# Altium PCB power_path_control.PcbDoc
Units mm, origin at the board's own origin, x right, y up, seen from the top; angles counter-clockwise.
Board outline 14 x 19.5 mm, 2 copper layers (Top Layer, Bottom Layer), stack 1.571 mm thick; 14 components, 6 nets, 38 pads, 43 vias.
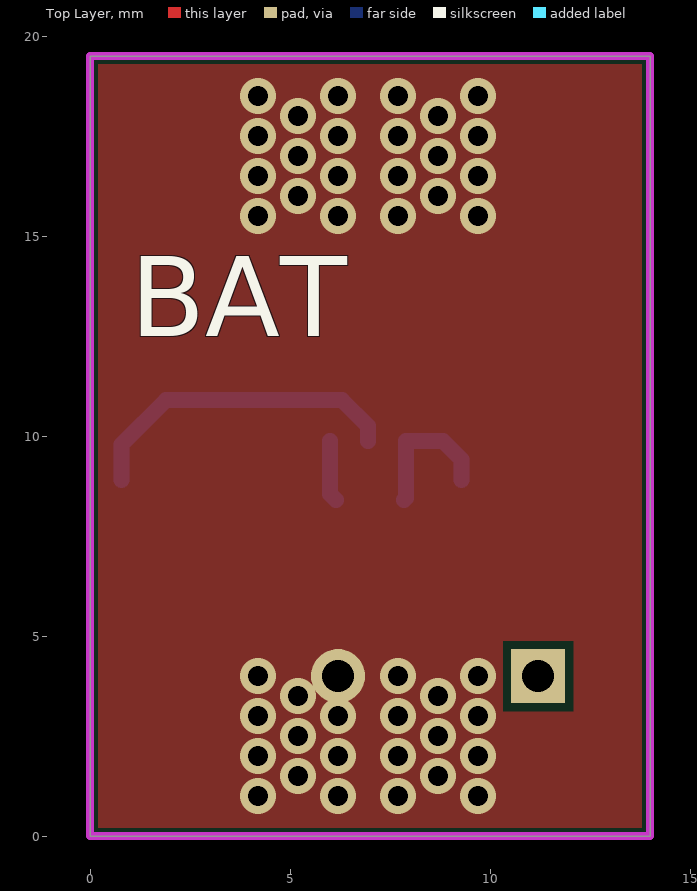
[diagram p0: Top Layer view]
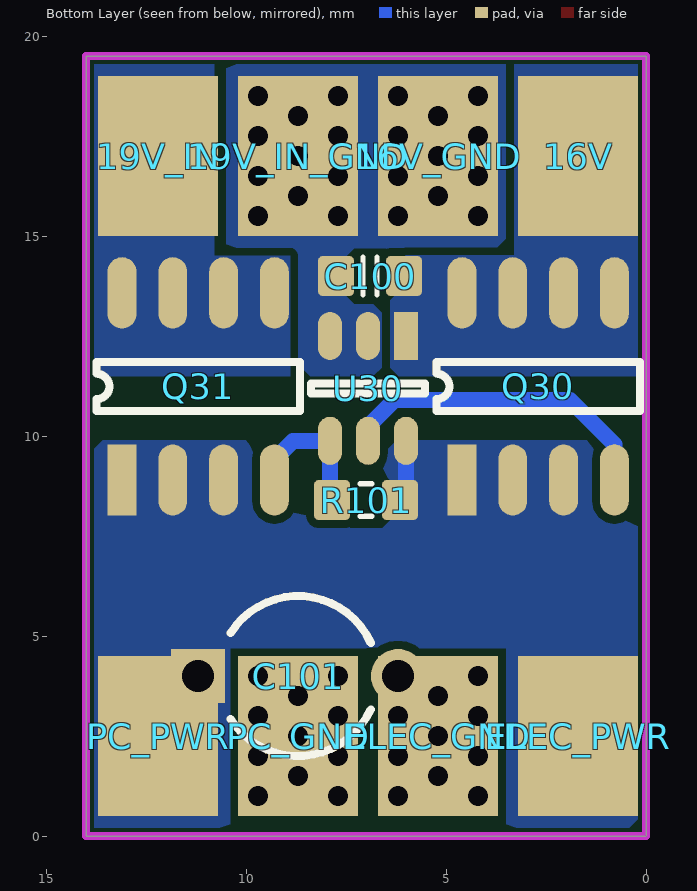
[diagram p1: Bottom Layer view, seen from below]
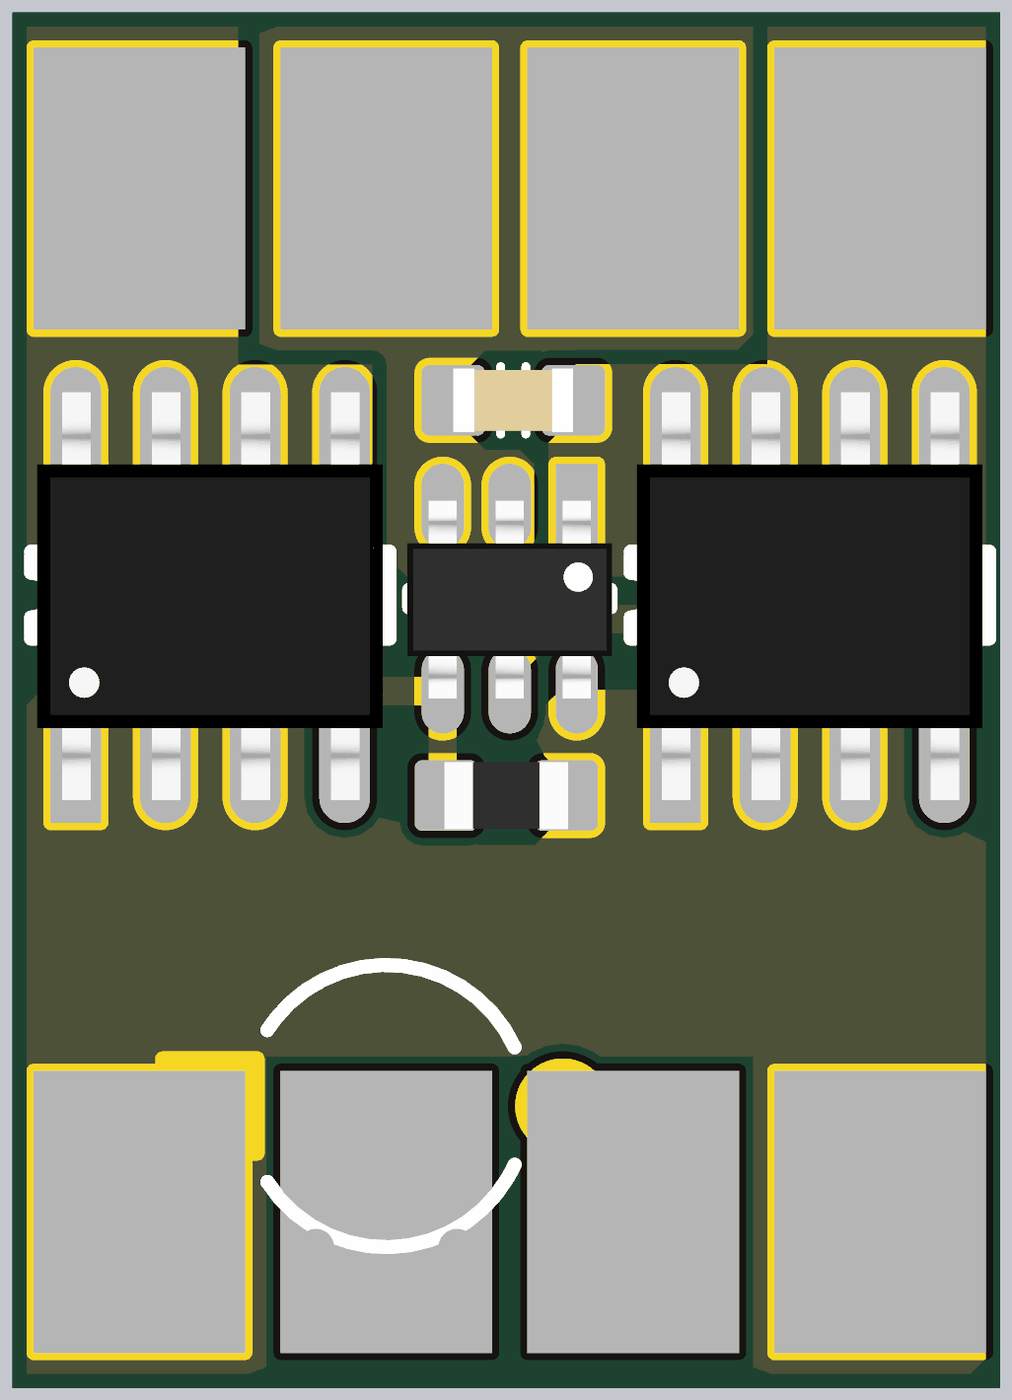
[diagram p2: 3D render of the assembled board from below, using the file's embedded part models]

## Layer stack, top to bottom
Top Solder: solder mask 0.0102, Solder Resist, Dk 3.5
Top Layer: signal copper 0.0356
Dielectric 1: dielectric 1.5, FR-4, Dk 4.8
Bottom Layer: signal copper 0.0356
Bottom Solder: solder mask 0.0102, Solder Resist, Dk 3.5

## Board outline
0,0 14,0 14,19.5 0,19.5

## Design rules (kind name [scope] priority, off if disabled: settings)
Clearance ClearanceKeepOut [(OnLayer('Keep-Out Layer'))] p1: gap=0.1
Clearance [All] p2: gap=0.2
ComponentClearance ComponentClearanceIgnore [InComponent('C101')] p1: gap=0 collisioncheckmode=3 verticalgap=0 showdistances=FALSE
ComponentClearance [All] p2: gap=0.2 collisioncheckmode=3 verticalgap=0.2 showdistances=FALSE
DiffPairsRouting [All] p1: maxlimit=1 minlimit=0.2 mostfreqgap=0.2 toplayer_minwidth=0.2 toplayer_maxwidth=1 toplayer_prefwidth=0.3 bottomlayer_minwidth=0.2 bottomlayer_maxwidth=1 bottomlayer_prefwidth=0.3 maxuncoupledlength=12.7
HoleSize [All] p1: absolutevalues=TRUE maxlimit=5 minlimit=0.025 maxpercent=80.000 minpercent=20.000
MinimumSolderMaskSliver [All] p1: minsoldermaskwidth=0.1
PolygonConnect PolygonConnectDirect [IsVia or InComponent('U7') or InNet('PGND')or InNet('PC_PWR') or InNet('Net16V_1') or InNet('Net19V_IN_1') or InComponent('C66') or InComponent('J4') or InComponent('C62') or InComponent('C13') or InComponent('C14') or InComponent('C58') or InComponent('S1') or InComponent('J8') or InComponent('J5') or InComponent('J10')] p1: connectstyle=Direct reliefconductorwidth=0.254 reliefentries=4 polygonreliefangle="90 Angle" airgapwidth=0.254
PolygonConnect [All] p2: connectstyle=Relief reliefconductorwidth=0.3 reliefentries=4 polygonreliefangle="90 Angle" airgapwidth=0.2
RoomDefinition power_path_control [InComponentClass('power_path_control')] p1: confinementstyle=ConfineIn formatcopy=TRUE lockcomponents=FALSE outline 0,-0.02 61.4,-0.02 61.4,35.68 0,35.68
RoutingVias [All] p1: holewidth=0.4 width=0.7 viastyle="Through Hole" minholewidth=0.3 minwidth=0.6 maxholewidth=1.5 maxwidth=2
SolderMaskExpansion [All] p1: expansion=0.102
Width [All] p1: maxlimit=2 minlimit=0.2 preferedwidth=0.3 minimp=50.000000 maximp=50.000000 favimp=50.000000
26 further rules are at their usual default settings.

## Components (designator, comment, footprint, x,y, rotation, side; value= is the part's Value field where it differs from the comment)
16V "HEADER-1" POWER-PAD-4x3 1.7,17 r90 bottom
16V_GND "HEADER-1" POWER-PAD-4x3 5.2,17 r90 bottom
19V_IN "HEADER-1" POWER-PAD-4x3 12.2,17 r90 bottom
19V_IN_GND "HEADER-1" POWER-PAD-4x3 8.7,17 r90 bottom
C100 "100n" CAPC1608X90N 6.9,14 r0 bottom
C101 "470uF" CAPR5-4X5 8.7,4 r180 bottom
ELEC_GND "HEADER-1" POWER-PAD-4x3 5.2,2.5 r90 bottom
ELEC_PWR "HEADER-1" POWER-PAD-4x3 1.7,2.5 r90 bottom
PC_GND "HEADER-1" POWER-PAD-4x3 8.7,2.5 r90 bottom
PC_PWR "HEADER-1" POWER-PAD-4x3 12.2,2.5 r90 bottom
Q30 "PMOS" SO8 4.6,8.9 r90 bottom
Q31 "PMOS" SO8 13.1,8.9 r90 bottom
R101 "470k" RESC1608N_ZERO 7,8.4 r0 bottom
U30 "LTC4412" TSOT-23-6 6,12.5 r270 bottom

## Footprints (in the part's own frame and the unit in brackets; to place one, negate y for a bottom-side part, rotate by r counter-clockwise, add the part's x,y. Pads: shape width x height; smd on the part's side, far side on the other; paste and mask are expansions set on the pad)
CAPC1608X90N [mm] "Chip Capacitor, Body 1.6x0.8mm, EIA 0603, IPC Medium Density"
  round 0.254 on Mech15: 0(0,0)
  rrect25% 0.9x1 smd: 1(-0.85,0) 2(0.85,0)
  Top Layer pour cut-out: -0.6,0.5 -0.4,0.7 0.4,0.7 0.6,0.5 0.6,-0.5 0.4,-0.7 -0.4,-0.7 -0.6,-0.5
  silkscreen extent -0.18,-0.48 0.18,0.48, body extent -0.85,-0.45 0.85,0.45, height 0.89
CAPR5-4X5 [mm] "Capacitor; 2 Leads"
  rect 1.35x1.35 hole 0.8: 1(-2.5,0)
  round 1.35 hole 0.8: 2(2.5,0)
  silkscreen extent -1.69,-2 1.82,2
POWER-PAD-4x3 [mm]
  rect 4x3 smd: 1(0,0)
RESC1608N_ZERO [mm] "Chip Resistor, Body 1.6x0.8mm, 0603, IPC Medium Density"
  round 0.254 on Mech15: 0(0,0)
  rrect25% 0.9x1 smd: 1(-0.85,0) 2(0.85,0)
  Top Layer pour cut-out: -0.6,0.5 -0.4,0.7 0.4,0.7 0.6,0.5 0.6,-0.5 0.4,-0.7 -0.4,-0.7 -0.6,-0.5
  silkscreen extent -0.15,-0.41 0.15,0.41, body extent -0.87,-0.47 0.88,0.48, height 0.54
SO8 [mm]
  rect 1.78x0.72 smd: 1(0,0)
  oval 1.78x0.72 smd: 2(0,-1.27) 3(0,-2.54) 4(0,-3.81) 5(4.68,-3.81) 6(4.68,-2.54) 7(4.68,-1.27) 8(4.68,0)
  silkscreen extent 1.72,-4.44 2.96,0.63, body extent -0.56,-4.35 5.21,0.55, height 1.46
TSOT-23-6 [mm]
  rect 1.2x0.6 smd: 1(0,0)
  oval 1.2x0.6 smd: 2(0,-0.95) 3(0,-1.9) 4(2.62,-1.9) 5(2.62,-0.95) 6(2.62,0)
  silkscreen extent 1.19,-2.38 1.43,0.48, body extent -0.07,-2.4 2.73,0.5, height 1.45

## Part data
C100: library part CAPC_10n_0603_X7R_50V_10%, "Capacitor SMD Cer 10nF 10% 50V X7R 0603"
C101: library part Cap2, "Capacitor"
R101: library part RES_0R_0603, "Resistor SMD chip 0.0 Ohm 0.1W 0603"

## Via types
v1: diameter 0.9, hole 0.5, Top Layer to Bottom Layer, 43 vias

## Nets (pads, with @x,y where several pads share a name; then routed paths per layer and width w, separated by ;. In a path a pad name is that pad's centre, name@x,y a point inside that pad or via, vN(x,y) a via of type N, cw(c..) or ccw(c..) an arc to the next point about the centre after c; other vN are vias at no path point)
Net16V_1: 16V.1 C100.1 Q30.5 Q30.6 Q30.7 Q30.8 U30.1
Net19V_IN_1: 19V_IN.1 Q31.5 Q31.6 Q31.7 Q31.8
NetQ30_4: Q30.4 U30.5 | length 8.1
  Bottom Layer w0.4: Q30.4 0.79,9.79 1.9,10.9 6.3,10.9 6.95,10.25 U30.5
NetQ31_4: Q31.4 R101.2 U30.4 | length 3.6
  Bottom Layer w0.4: R101.2 7.9,8.45 U30.4 8.82,9.88 9.29,9.41 Q31.4
PC_PWR: C101.1 ELEC_PWR.1 PC_PWR.1 Q30.1 Q30.2 Q30.3 Q31.1 Q31.2 Q31.3 R101.1 U30.6 | length 1.5
  Bottom Layer w0.4: U30.6 6,8.55 R101.1
PGND: 16V_GND.1 19V_IN_GND.1 C100.2 C101.2 ELEC_GND.1 PC_GND.1 U30.2 U30.3
  other v1: 4.2,1 6.2,1 7.7,1 9.7,1 5.2,1.5 8.7,1.5 4.2,2 6.2,2 7.7,2 9.7,2 5.2,2.5 8.7,2.5 4.2,3 6.2,3 7.7,3 9.7,3 5.2,3.5 8.7,3.5 4.2,4 7.7,4 9.7,4 4.2,15.5 6.2,15.5 7.7,15.5 9.7,15.5 5.2,16 8.7,16 4.2,16.5 6.2,16.5 7.7,16.5 9.7,16.5 5.2,17 8.7,17 4.2,17.5 6.2,17.5 7.7,17.5 9.7,17.5 5.2,18 8.7,18 4.2,18.5 6.2,18.5 7.7,18.5 9.7,18.5
pads on no net: C100.0 R101.0

## Polygon pours and split planes (outlines as drawn)
Net16V_1 on Bottom Layer "Top Layer-No Net 1" (solid, remove dead copper, pour order 10): 0,19.5 0,11.5 6.4,11.5 6.4,14.514 3.3,14.514 3.3,19.5
Net19V_IN_1 on Bottom Layer "Top Layer-No Net 1" (solid, remove dead copper, pour order 11): 14,19.5 14,11.5 8.9,11.5 8.9,14.504 10.8,14.504 10.8,19.5
PC_PWR on Bottom Layer "Top Layer-No Net 1" (solid, remove dead copper, pour order 12): 0,0 0,9.9 14,9.9 14,0
PGND on Bottom Layer "Top Layer-No Net 1" (solid, remove dead copper, pour order 14): 3.3,19.5 3.3,11.496 10.8,11.496 10.8,19.5
PGND on Top Layer "Top Layer-No Net 1" (solid, remove dead copper, pour order 13): 0,19.5 14,19.5 14,0 0,0

## Keep-outs
Keep-Out Layer:
  the board outline again, w0.2

## Silkscreen, mask and mechanical layers (free items; w line width, h text height)
Top Overlay:
  text "BAT" at 1,12.5 h2